# Altium PCB LM2596_HV.PcbDoc
Units mm, origin at the board's own origin, x right, y up, seen from the top; angles counter-clockwise.
Board outline 57.5 x 37.5 mm, 2 copper layers (Top Layer, Bottom Layer); 19 components, 8 nets, 61 pads, 17 vias.
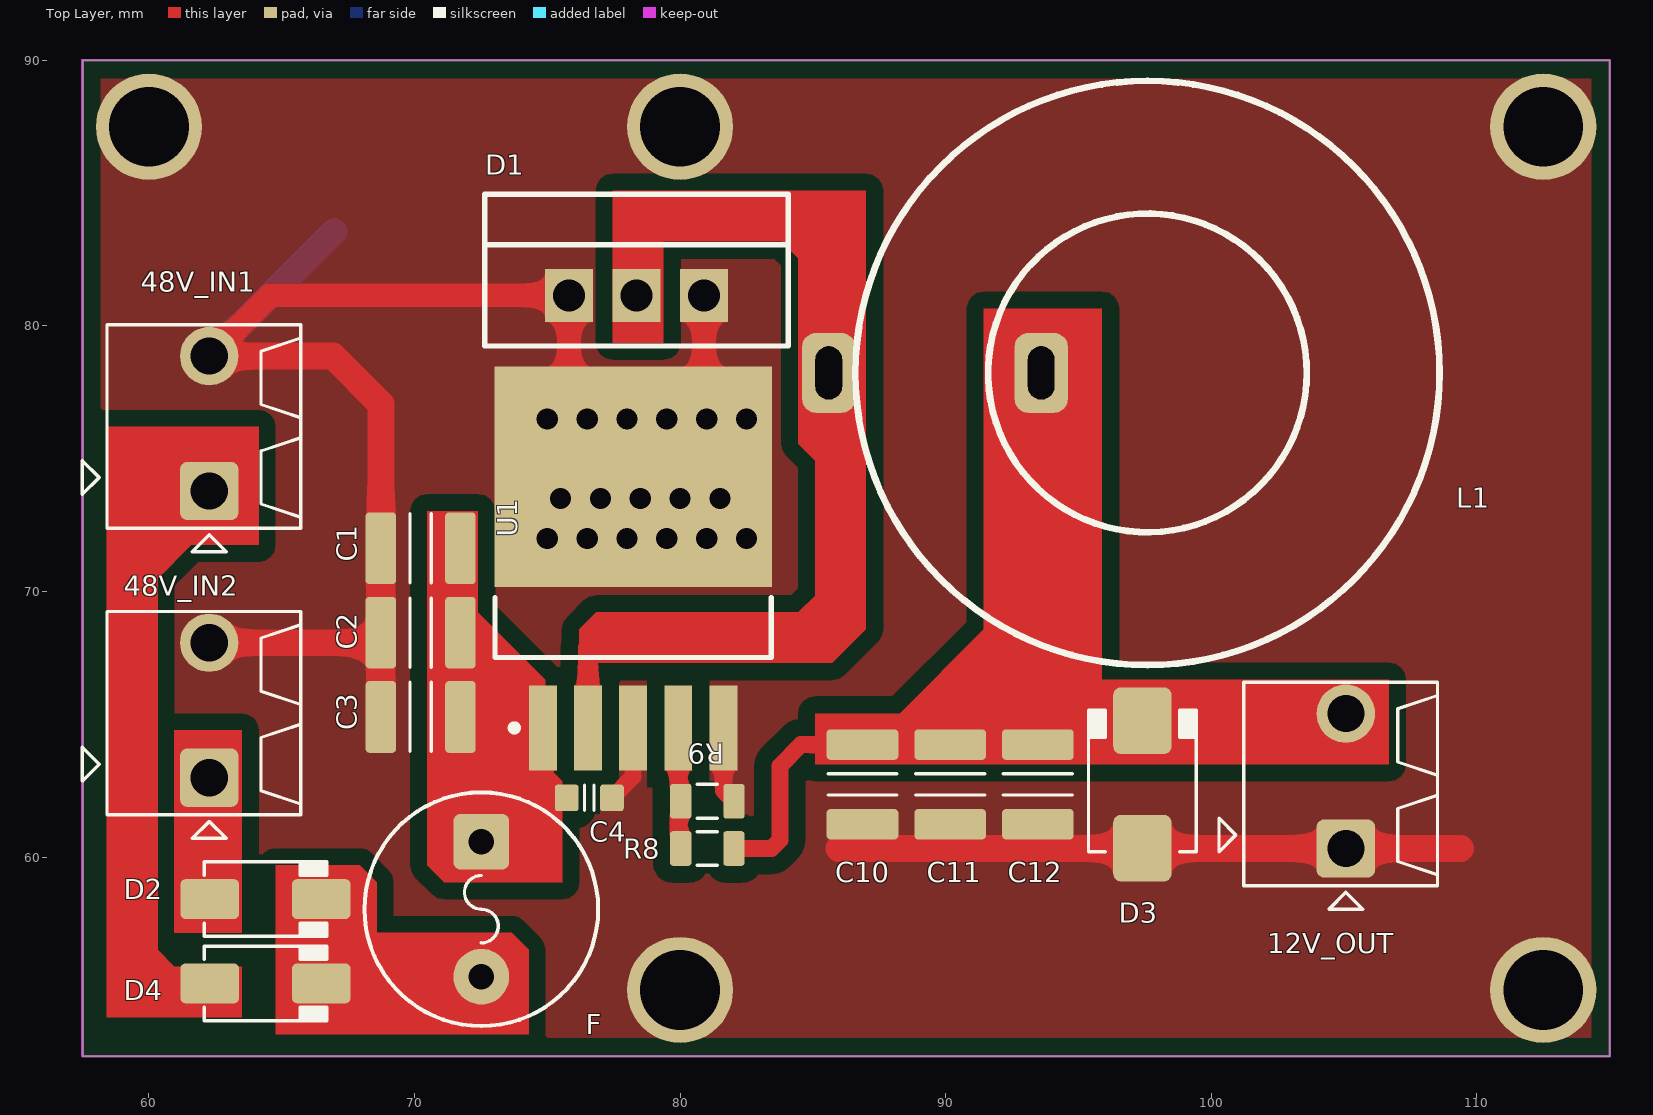
[diagram p0: Top Layer view]
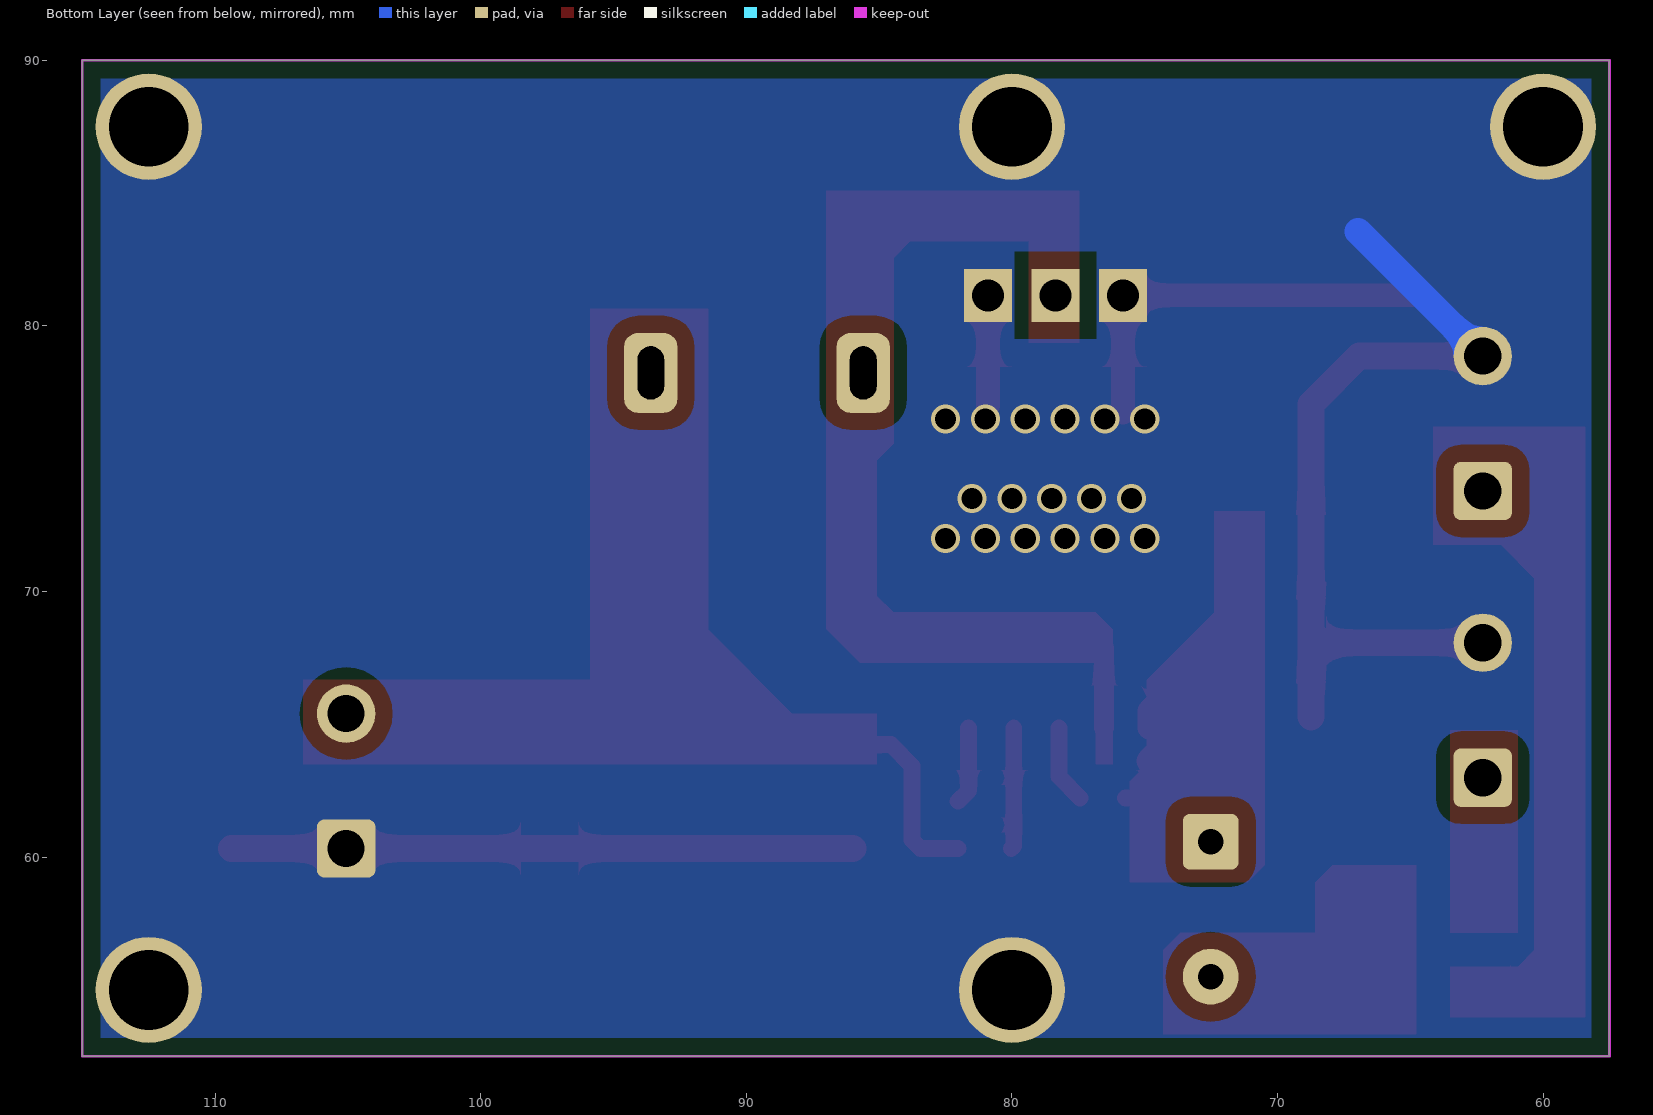
[diagram p1: Bottom Layer view, seen from below]
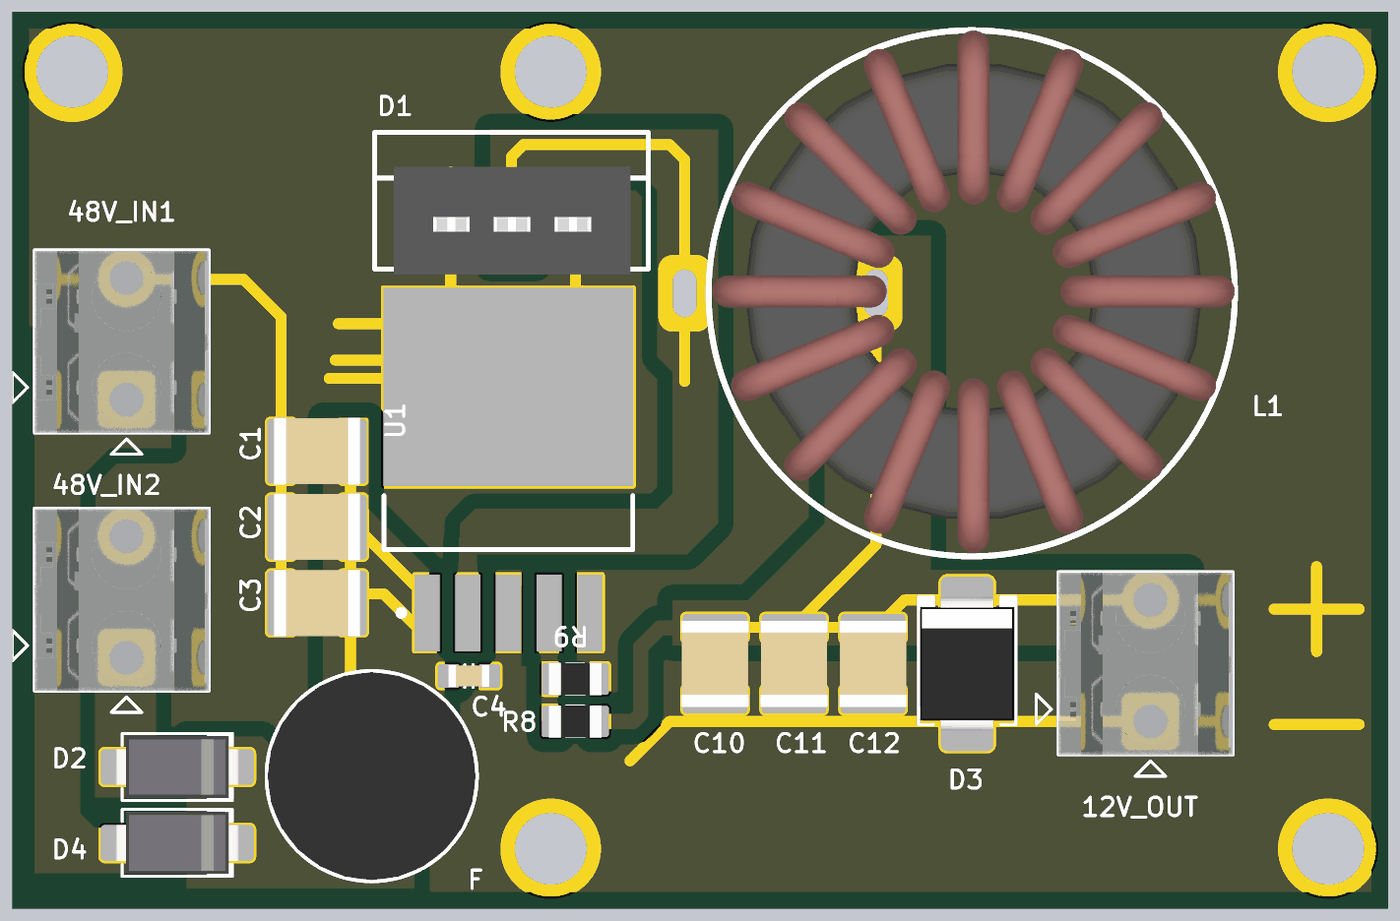
[diagram p2: 3D render of the assembled board from above, using the file's embedded part models]

## Layer stack, top to bottom
Top Solder: solder mask 0.0102, Solder Resist, Dk 3.5
Top Layer: signal copper 0.0356
Dielectric 1: dielectric 0.32, FR-4, Dk 4.8
Bottom Layer: signal copper 0.0356
Bottom Solder: solder mask 0.0102, Solder Resist, Dk 3.5

## Board outline
57.5,52.5 115,52.5 115,90 57.5,90

## Design rules (kind name [scope] priority, off if disabled: settings)
Clearance [All] p1: gap=0.635
PlaneConnect [All] p1: planeconnectstyle=Direct reliefexpansion=0.508 reliefentries=4 reliefconductorwidth=0.254 reliefairgap=0.254
PolygonConnect [All] p1: connectstyle=Direct reliefconductorwidth=0.254 reliefentries=4 polygonreliefangle="90 Angle" airgapwidth=0.254
RoutingVias [All] p1: holewidth=0.711 width=1.27 viastyle="Through Hole" minholewidth=0.5 minwidth=1.1 maxholewidth=5 maxwidth=5
SolderMaskExpansion [All] p1: expansion=0.102
Width [All] p1: maxlimit=2 minlimit=0.254 preferedwidth=0.254
29 further rules are at their usual default settings.

## Classes and differential pairs
component class LM2596_HV: 12V_OUT 48V_IN1 48V_IN2 C1 C2 C3 C4 C10 C11 C12 D2 D3 D4 F L1 R8 R9 U1

## Components (designator, comment, footprint, x,y, rotation, side; value= is the part's Value field where it differs from the comment)
12V_OUT "Stackable ScrewTerm" 2P_PCB_ScrewTerm_200mil 101.219,58.928 r0 top
48V_IN1 "Stackable ScrewTerm" 2P_PCB_ScrewTerm_200mil 58.42,72.39 r0 top
48V_IN2 "Stackable ScrewTerm" 2P_PCB_ScrewTerm_200mil 58.42,61.595 r0 top
C1 "CAP NP" CAPC3225N 70.231,71.628 r0 top
C2 "CAP NP" CAPC3225N 70.231,68.453 r0 top
C3 "CAP NP" CAPC3225N 70.231,65.278 r0 top
C4 "CAP NP" CAPC1608N 76.581,62.23 r180 top
C10 "CAP NP" CAPC3225N 86.868,62.738 r90 top
C11 "CAP NP" CAPC3225N 90.17,62.738 r90 top
C12 "CAP NP" CAPC3225N 93.472,62.738 r90 top
D1 "MOSPEC S20C40C" TO-220 78.359,81.153 r0 top
D2 "" DO-214AC 64.389,58.42 r0 top
D3 "TVS12V" DO-214AA 97.409,62.738 r90 top
D4 "SS14" DO-214AC 64.389,55.245 r0 top
F "1.5A" FUSE_SR-5-BK 72.517,58.039 r270 top
L1 "Inductor" Toroid 85.598,78.359 r0 top
R8 "Res" RESC2012N 81.026,60.325 r0 top
R9 "Res" RESC2012N 81.026,62.103 r180 top
U1 "LM2596S-ADJ" TS5B_N 78.232,70.866 r90 top

## Footprints (in the part's own frame and the unit in brackets; to place one, negate y for a bottom-side part, rotate by r counter-clockwise, add the part's x,y. Pads: shape width x height; smd on the part's side, far side on the other; paste and mask are expansions set on the pad)
2P_PCB_ScrewTerm_200mil [mm]
  rrect25% 2.2x2.2 hole 1.4: 1(3.85,1.397)
  round 2.2 hole 1.4: 2(3.85,6.477)
  silkscreen extent -0.93,-0.89 7.3,7.66, body extent 0,0 7.3,7.62, height 8.5
CAPC1608N [mm] "Chip Capacitor, Body 1.6x0.8mm, 0603, IPC Medium Density"
  round 0.254 on Mech14: 0(0,0)
  rrect25% 0.9x1 smd: 1(-0.85,0) 2(0.85,0)
  Top Layer pour cut-out: -0.4,0.6 0.4,0.6 0.4,-0.6 -0.4,-0.6
  silkscreen extent -0.18,-0.48 0.18,0.48, body extent -0.85,-0.45 0.85,0.45, height 0.89
CAPC3225N [mm] "Chip Capacitor, Body 3.2x2.5mm, 1210, IPC Medium Density"
  round 0.508 on Mech14: 0(0,0)
  rrect25% 1.15x2.7 smd: 1(-1.5,0) 2(1.5,0)
  silkscreen extent -0.4,-1.3 0.4,1.3, body extent -1.8,-1.4 1.8,1.4, height 2.19
DO-214AA [mm] "JEDEC DO214 variation AA. SMB"
  round 0.508 on Mech14: 0(0,0)
  rrect25% 2.5x2.2 smd: A(-2.4,0) K(2.4,0)
  silkscreen extent -2.54,-2.03 2.79,2.03, body extent -2.8,-1.97 2.8,1.98, height 2.62
DO-214AC [mm] "JEDEC DO214 variation AC. SMA"
  round 0.508 on Mech14: 0(0,0)
  rrect25% 2.2x1.5 smd: A(-2.1,0) K(2.1,0)
  silkscreen extent -2.3,-1.4 2.3,1.4, body extent -2.6,-1.3 2.6,1.3, height 2.42
FUSE_SR-5-BK [mm]
  round 0.5 on Mech14: 0(0,0)
  rrect25% 2.1x2.1 hole 0.965: 1(-2.54,0)
  round 2.1 hole 0.965: 2(2.54,0)
  silkscreen extent -4.4,-4.4 4.4,4.4, body extent -4.35,-4.32 4.35,4.32, height 8.29
RESC2012N [mm] "Chip Resistor, Body 2.0x1.2mm, 0805, IPC Medium Density"
  round 0.254 on Mech14: 0(0,0)
  rrect25% 0.8x1.3 smd: 1(-1,0) 2(1,0)
  Top Layer pour cut-out: -0.6,0.75 0.6,0.75 0.6,-0.75 -0.6,-0.75
  silkscreen extent -0.38,-0.64 0.38,0.64, body extent -1.1,-0.67 1.1,0.68, height 0.69
TO-220 [mm]
  rect 1.8x2 hole 1.2: 1(-2.54,0) 2(0,0) 3(2.54,0)
  silkscreen extent -5.71,-1.91 5.71,3.81, body extent -4.92,-2.13 4.98,2.37, height 8.08
Toroid [mm]
  rrect50% 2x3 hole 1 slot 2 at 90 deg: 1(0,-0.127) 2(8,-0.127)
  silkscreen extent 1,-11.13 23,10.87, body extent 1.16,-10.97 23,10.87, height 11.43
TS5B_N [mm] "D2-PAK, 6-Leads, Body 8.6x10.2mm, Pitch 1.7mm, Lead Span 14.1mm, IPC Medium Density"
  rect 3.2x1.05 smd: 1(-6,3.4) 2(-6,1.7) 3(-6,0) 4(-6,-1.7) 5(-6,-3.4)
  rect 8.3x10.45 smd: 6(3.45,0)
  silkscreen extent -6.12,-5.2 -1.1,5.2, body extent -3.35,-5.2 6.05,5.2, height 4.65

## Part data
12V_OUT 48V_IN1 48V_IN2: library part 2P_ScrewTerm_90S_3.81MM, "Terminal Block Screw Type THT 2-Position 3.81mm pitch"
D1: library part "Diode x2"
D2 D3 D4: library part "Diode Schottky"
F: library part Fuse
U1: "SIMPLE SWITCHER Power Converter 150 KHz 3A Step-Down Voltage Regulator"

## Free pads (board coordinates)
  round 4 hole 3: GND(60,87.5) GND(80,55) GND(80,87.5) GND(112.5,55) GND(112.5,87.5)

## Via types
v1: diameter 1.1, hole 0.8, Top Layer to Bottom Layer, 17 vias

## Nets (pads, with @x,y where several pads share a name; then routed paths per layer and width w, separated by ;. In a path a pad name is that pad's centre, name@x,y a point inside that pad or via, vN(x,y) a via of type N, cw(c..) or ccw(c..) an arc to the next point about the centre after c; other vN are vias at no path point)
+12V: 12V_OUT.2 C10.2 C11.2 C12.2 D3.K L1.2 R8.2 | length 42.2
  Top Layer w0.635: R8.2 83.439,60.325 83.757,60.642 83.757,63.436 84.558,64.238 C10.2
  Top Layer w0.762: C11.2 93.598,67.666 L1.2
  Top Layer w1.016: C10.2 C11.2 C12.2 94.639,65.405 12V_OUT.2
+48V_IN1: 48V_IN2.1 D2.A | length 4.6
  Top Layer w1.016: 48V_IN2.1 62.289,62.973 D2.A
+48V_IN2: 48V_IN1.1 D4.A | length 22.2
  Top Layer w1.016: 48V_IN1.1 59.309,70.826 59.309,56.261 60.325,55.245 D4.A
FB: R8.1 R9.2 U1.4 | length 4.6
  Top Layer w0.635: U1.4 79.932,60.419 R8.1
GND: 12V_OUT.1 48V_IN1.2 48V_IN2.2 C1.1 C2.1 C3.1 C4.1 C10.1 C11.1 C12.1 D1.1 D1.3 D3.A pad.GND R9.1 U1.3 U1.5 U1.6 | length 84.7
  Top Layer w0.635: C4.1 78.232,63.031 U1.3 ; U1.5 81.632,62.497 R9.1
  Top Layer w0.889: 48V_IN1.2 64.556,81.153 D1.1 U1.6@75.819,76.729 ; U1.6@80.899,76.983 D1.3
  Top Layer w1.016: 48V_IN2.2 68.35,68.072 C2.1 ; 48V_IN1.2 66.929,78.867 68.731,77.065 C1.1 C2.1 ; C3.1 C2.1 ; 85.979,60.325 109.387,60.325
  Bottom Layer w1.016: 48V_IN1.2 66.969,83.566
  other v1: 75,72 76.5,72 78,72 79.5,72 81,72 82.5,72 75.5,73.5 77,73.5 78.5,73.5 80,73.5 81.5,73.5 75,76.5 76.5,76.5 78,76.5 79.5,76.5 81,76.5 82.5,76.5
NetD2_2: D2.K D4.K F.2 | length 9.3
  Top Layer w1.016: D2.K D4.K 72.263,55.245 F.2
SW: D1.2 L1.1 U1.2 | length 37.5
  Top Layer w0.762: U1.2 76.532,67.896 76.962,68.326 84.201,68.326 85.598,69.723 L1.1 85.598,83.947 85.09,84.455 78.994,84.455 78.359,83.82 D1.2
VIN: C1.2 C2.2 C3.2 C4.2 F.1 U1.1 | length 23.3
  Top Layer w0.635: U1.1@74.803,63.627 74.803,62.611 75.184,62.23 C4.2
  Top Layer w0.889: C2.2@71.628,68.707 74.832,65.503 U1.1
  Top Layer w1.016: C1.2@71.628,72.517 71.628,68.707 71.628,61.468 F.1 ; C3.2 73.152,65.278 U1.1@74.803,63.627
pads on no net: C1.0 C2.0 C3.0 C4.0 C10.0 C11.0 C12.0 D2.0 D3.0 D4.0 F.0 R8.0 R9.0

## Polygon pours and split planes (outlines as drawn)
GND on Top Layer "Top Layer-No Net" (solid, pour order 12): 57.5,52.5 115,52.5 115,90 57.5,90
GND on Bottom Layer "Top Layer-No Net" (solid, pour order 14): 57.5,52.5 115,52.5 115,90 57.5,90

## Keep-outs
Keep-Out Layer:
  the board outline again, w0.1

## Other copper
Top Layer:
  region net +12V: 91.44,80.645 95.885,80.645 95.885,66.675 106.68,66.675 106.68,63.5 85.09,63.5 85.09,65.405 88.265,65.405 91.44,68.58
  region net SW: 76.2,63.5 76.2,68.58 76.835,69.215 84.455,69.215 85.09,69.85 85.09,74.93 84.455,75.565 84.455,82.55 83.82,83.185 79.375,83.185 79.375,79.375 77.47,79.375 77.47,85.09 78.105,85.09 82.55,85.09 86.36,85.09 86.995,85.09 86.995,68.58 85.725,67.31 76.835,67.31 76.835,63.5
  region net NetD2_2: 64.77,59.69 67.945,59.69 68.58,59.055 68.58,57.15 73.66,57.15 74.295,56.515 74.295,53.34 64.77,53.34
  region net +48V_IN2: 63.5,55.88 63.5,53.975 58.42,53.975 58.42,76.2 64.135,76.2 64.135,71.755 61.595,71.755 60.325,70.485 60.325,56.515 60.96,55.88
  region net +48V_IN1: 60.96,64.77 63.5,64.77 63.5,57.15 60.96,57.15
  region net VIN: 71.12,59.055 70.485,59.69 70.485,73.025 72.39,73.025 72.39,69.215 74.93,66.675 74.93,63.5 75.565,62.865 75.565,59.055

## Silkscreen, mask and mechanical layers (free items; w line width, h text height)
Top Solder:
  lines w0.457: 62.27,78.867 62.321,78.816 67.158,78.816 68.732,77.241 68.732,65.253 ; 70.739,74.676 74.549,74.676 ; 70.993,75.438 74.676,75.438 ; 71.12,76.962 74.93,76.962 ; 71.628,68.453 71.755,68.453 71.882,68.453 74.803,65.532 ; 71.755,72.288 71.628,72.161 71.628,61.773 72.517,60.884 72.517,60.579 ; 72.136,65.659 73.025,65.659 74.549,64.135 ; 75.819,78.359 75.819,83.312 ; 78.359,81.153 78.359,83.947 78.867,84.455 84.963,84.455 85.598,83.82 85.598,74.549 ; 81.026,76.962 81.026,82.931 ; 83.312,58.674 84.963,60.325 105.069,60.325 ; 87.96,64.262 93.65,64.262 94.793,65.405 105.069,65.405 ; 90.475,64.592 93.598,67.715 93.598,78.232 ; 110.236,60.198 113.792,60.198 ; 110.236,65.024 113.792,65.024 ; 112.014,63.246 112.014,66.802